# Altium PCB Arduino NG Ahuratus-PCB.PcbDoc (part 2 of 6)
Units mm, origin at the board's own origin, x right, y up, seen from the top; angles counter-clockwise.
Board outline 69 x 53.5 mm, 2 copper layers (Top Layer, Bottom Layer); 37 components, 49 nets, 193 pads, 40 vias.
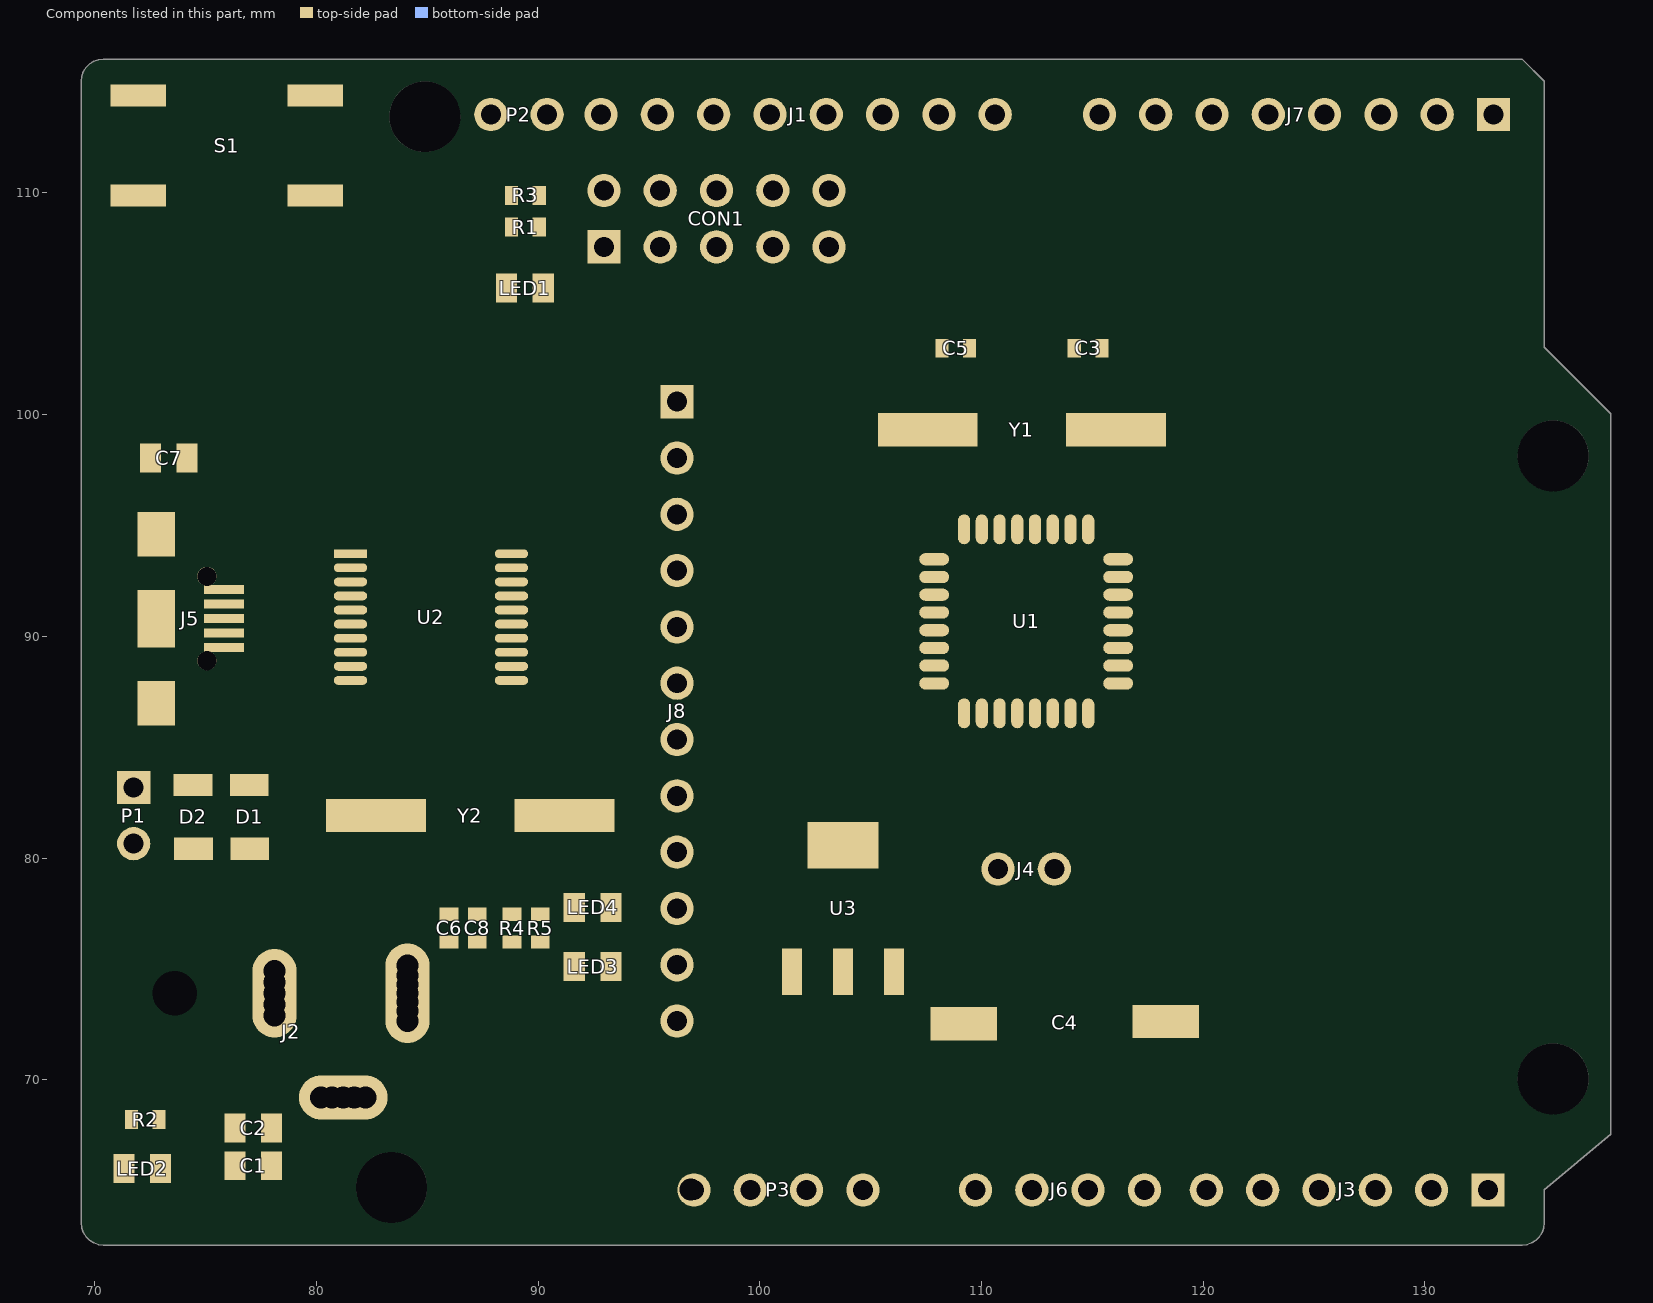
[diagram p2: the components of this part, seen from the top]

## Via types
v1: diameter 1.27, hole 0.711, Top Layer to Bottom Layer, 40 vias

## Nets (pads, with @x,y where several pads share a name; then routed paths per layer and width w, separated by ;. In a path a pad name is that pad's centre, name@x,y a point inside that pad or via, vN(x,y) a via of type N, cw(c..) or ccw(c..) an arc to the next point about the centre after c; other vN are vias at no path point) (continued)
copper on no net: | length 3553.7
  Top Layer w0.025: 115.367,107.518 115.951,107.518 ; 115.367,107.544 115.951,107.544 ; 115.367,107.569 115.926,107.569 ; 115.367,107.594 115.926,107.594 ; 115.367,107.62 115.926,107.62 ; 115.367,107.645 115.926,107.645 ; 115.367,107.671 115.926,107.671 ; 115.367,107.696 115.951,107.696 ; 115.367,107.721 115.951,107.721 ; 115.392,107.34 115.976,107.34 ; 115.392,107.366 115.976,107.366 ; 115.392,107.391 115.951,107.391 ; 115.392,107.417 115.951,107.417 ; 115.392,107.442 115.951,107.442 ; 115.392,107.467 115.951,107.467 ; 115.392,107.493 115.951,107.493 ; 115.392,107.747 115.951,107.747 ; 115.392,107.772 115.951,107.772 ; 115.392,107.798 115.951,107.798 ; 115.392,107.823 115.951,107.823 ; 115.392,107.848 115.951,107.848 ; 115.392,107.874 115.976,107.874 ; 115.392,107.899 115.976,107.899 ; 115.418,107.239 116.027,107.239 ; 115.418,107.264 116.002,107.264 ; 115.418,107.29 116.002,107.29 ; 115.418,107.315 115.976,107.315 ; 115.418,107.925 115.976,107.925 ; 115.418,107.95 116.002,107.95 ; 115.418,107.975 116.002,107.975 ; 115.418,108.001 116.027,108.001 ; 115.443,107.163 116.053,107.163 ; 115.443,107.188 116.053,107.188 ; 115.443,107.213 116.027,107.213 ; 115.443,108.026 116.027,108.026 ; 115.443,108.052 116.027,108.052 ; 115.443,108.077 116.053,108.077 ; 115.468,104.8 115.672,104.8 ; 115.468,104.826 115.697,104.826 ; 115.468,104.851 115.697,104.851 ; 115.468,107.086 116.103,107.086 ; 115.468,107.112 116.078,107.112 ; 115.468,107.137 116.078,107.137 ; 115.468,108.102 116.078,108.102 ; 115.468,108.128 116.078,108.128 ; 115.468,108.153 116.103,108.153 ; 115.494,104.877 115.697,104.877 ; 115.494,104.902 115.722,104.902 ; 115.494,104.927 115.722,104.927 ; 115.494,104.953 115.722,104.953 ; 115.494,107.036 116.129,107.036 ; 115.494,107.061 116.129,107.061 ; 115.494,108.179 116.129,108.179 ; 115.494,108.204 116.129,108.204 ; 115.494,108.229 116.154,108.229 ; 115.519,104.978 115.748,104.978 ; 115.519,105.004 116.332,105.004 ; 115.519,105.029 116.332,105.029 ; 115.519,106.985 116.18,106.985 ; 115.519,107.01 116.154,107.01 ; 115.519,108.255 116.18,108.255 ; 115.519,108.28 116.205,108.28 ; 115.545,105.054 116.307,105.054 ; 115.545,105.08 116.307,105.08 ; 115.545,105.105 116.307,105.105 ; 115.545,106.934 116.23,106.934 ; 115.545,106.959 116.205,106.959 ; 115.545,108.306 116.23,108.306 ; 115.57,105.131 116.281,105.131 ; 115.57,105.156 116.281,105.156 ; 115.57,105.181 115.799,105.181 ; 115.57,106.883 116.281,106.883 ; 115.57,106.909 116.256,106.909 ; 115.57,108.331 116.256,108.331 ; 115.57,108.356 116.281,108.356 ; 115.595,105.207 115.799,105.207 ; 115.595,105.232 115.824,105.232 ; 115.595,105.258 115.824,105.258 ; 115.595,105.283 115.824,105.283 ; 115.595,106.832 116.357,106.832 ; 115.595,106.858 116.332,106.858 ; 115.595,108.382 116.307,108.382 ; 115.595,108.407 116.357,108.407 ; 115.621,105.308 115.824,105.308 ; 115.621,105.334 115.849,105.334 ; 115.621,105.359 115.849,105.359 ; 115.621,106.807 116.408,106.807 ; 115.621,108.433 116.383,108.433 ; 115.646,105.385 115.849,105.385 ; 115.646,105.41 115.875,105.41 ; 115.646,105.435 115.875,105.435 ; 115.646,106.756 116.484,106.756 ; 115.646,106.782 116.434,106.782 ; 115.646,108.458 116.434,108.458 ; 115.646,108.483 116.484,108.483 ; 115.672,105.461 115.875,105.461 ; 115.672,105.486 115.875,105.486 ; 115.672,105.512 115.9,105.512 ; 115.672,106.731 116.535,106.731 ; 115.672,108.509 116.535,108.509 ; 115.697,105.537 115.9,105.537 ; 115.697,105.562 115.9,105.562 ; 115.697,105.588 116.154,105.588 ; 115.697,105.613 116.129,105.613 ; 115.697,106.705 116.611,106.705 ; 115.697,108.534 116.611,108.534 ; 115.722,105.639 116.129,105.639 ; 115.722,105.664 116.129,105.664 ; 115.722,105.689 116.129,105.689 ; 115.722,106.655 116.865,106.655 ; 115.722,106.68 116.713,106.68 ; 115.722,108.56 116.688,108.56 ; 115.722,108.585 116.865,108.585 ; 115.748,105.715 116.103,105.715 ; 115.748,105.74 116.103,105.74 ; 115.748,105.766 116.103,105.766 ; 115.748,106.629 118.237,106.629 ; 115.748,108.61 118.237,108.61 ; 115.773,105.791 116.078,105.791 ; 115.773,105.816 116.078,105.816 ; 115.773,106.604 118.212,106.604 ; 115.773,108.636 118.212,108.636 ; 115.799,106.578 118.186,106.578 ; 115.799,108.661 118.186,108.661 ; 115.824,106.553 118.161,106.553 ; 115.824,108.687 118.161,108.687 ; 115.849,106.528 118.135,106.528 ; 115.849,108.712 118.135,108.712 ; 115.875,106.502 118.11,106.502 ; 115.875,108.737 118.11,108.737 ; 115.9,106.477 118.085,106.477 ; 115.9,108.763 118.059,108.763 ; 115.926,105.537 116.154,105.537 ; 115.926,105.562 116.154,105.562 ; 115.926,108.788 118.034,108.788 ; 115.951,105.435 116.205,105.435 ; 115.951,105.461 116.18,105.461 ; 115.951,105.486 116.18,105.486 ; 115.951,105.512 116.18,105.512 ; 115.951,106.451 118.034,106.451 ; 115.976,105.359 116.23,105.359 ; 115.976,105.385 116.205,105.385 ; 115.976,105.41 116.205,105.41 ; 115.976,106.426 118.008,106.426 ; 115.976,108.814 118.008,108.814 ; 116.002,105.258 116.256,105.258 ; 116.002,105.283 116.23,105.283 ; 116.002,105.308 116.23,105.308 ; 116.002,105.334 116.23,105.334 ; 116.002,106.401 117.983,106.401 ; 116.002,108.839 117.958,108.839 ; 116.027,105.181 116.281,105.181 ; 116.027,105.207 116.256,105.207 ; 116.027,105.232 116.256,105.232 ; 116.053,106.375 117.932,106.375 ; 116.053,108.864 117.932,108.864 ; 116.078,106.35 117.907,106.35 ; 116.078,108.89 117.881,108.89 ; 116.103,104.902 116.357,104.902 ; 116.103,104.927 116.357,104.927 ; 116.103,104.953 116.332,104.953 ; 116.103,104.978 116.332,104.978 ; 116.103,108.915 117.856,108.915 ; 116.129,104.826 116.383,104.826 ; 116.129,104.851 116.383,104.851 ; 116.129,104.877 116.357,104.877 ; 116.129,106.324 117.856,106.324 ; 116.154,104.8 116.383,104.8 ; 116.154,108.941 117.805,108.941 ; 116.18,106.299 117.831,106.299 ; 116.205,106.274 117.78,106.274 ; 116.205,108.966 117.754,108.966 ; 116.256,106.248 117.729,106.248 ; 116.256,108.991 117.704,108.991 ; 116.307,109.017 117.653,109.017 ; 116.332,106.223 117.678,106.223 ; 116.383,106.197 117.602,106.197 ; 116.383,109.042 117.577,109.042 ; 116.459,104.826 116.688,104.826 ; 116.459,104.851 116.688,104.851 ; 116.459,104.877 116.688,104.877 ; 116.459,104.902 116.688,104.902 ; 116.459,104.927 116.688,104.927 ; 116.459,104.953 116.688,104.953 ; 116.459,104.978 116.688,104.978 ; 116.459,105.004 116.688,105.004 ; 116.459,105.029 116.688,105.029 ; 116.459,105.054 116.688,105.054 ; 116.459,105.08 116.688,105.08 ; 116.459,105.105 116.688,105.105 ; 116.459,105.131 116.688,105.131 ; 116.459,105.156 116.688,105.156 ; 116.459,105.181 116.688,105.181 ; 116.459,105.207 116.688,105.207 ; 116.459,105.232 117.043,105.232 ; 116.459,105.258 117.018,105.258 ; 116.459,105.283 116.992,105.283 ; 116.459,105.308 117.069,105.308 ; 116.459,105.334 117.094,105.334 ; 116.459,105.359 117.119,105.359 ; 116.459,105.385 116.688,105.385 ; 116.459,105.41 116.688,105.41 ; 116.459,105.435 116.688,105.435 ; 116.459,105.461 116.688,105.461 ; 116.459,105.486 116.688,105.486 ; 116.459,105.512 116.688,105.512 ; 116.459,105.537 116.688,105.537 ; 116.459,105.562 116.688,105.562 ; 116.459,105.588 116.688,105.588 ; 116.459,105.613 116.688,105.613 ; 116.459,105.639 116.688,105.639 ; 116.459,105.664 117.17,105.664 ; 116.459,105.689 117.145,105.689 ; 116.459,105.715 117.145,105.715 ; 116.459,105.74 117.119,105.74 ; 116.459,105.766 117.069,105.766 ; 116.459,105.791 117.043,105.791 ; 116.459,105.816 116.967,105.816 ; 116.459,106.172 117.551,106.172 ; 116.459,109.068 117.5,109.068 ; 116.484,104.8 116.688,104.8 ; 116.51,107.518 117.5,107.518 ; 116.51,107.544 117.5,107.544 ; 116.51,107.569 117.5,107.569 ; 116.51,107.594 117.5,107.594 ; 116.51,107.62 117.5,107.62 ; 116.51,107.645 117.5,107.645 ; 116.51,107.671 117.5,107.671 ; 116.51,107.696 117.5,107.696 ; 116.51,107.721 117.5,107.721 ; 116.51,107.747 117.5,107.747 ; 116.51,107.772 117.5,107.772 ; 116.51,107.798 117.5,107.798 ; 116.51,107.823 117.475,107.823 ; 116.535,106.147 117.45,106.147 ; 116.535,109.093 117.424,109.093 ; 116.637,109.118 117.297,109.118 ; 116.662,106.121 117.348,106.121 ; 116.713,105.207 117.069,105.207 ; 116.815,105.181 117.069,105.181 ; 116.815,105.385 117.145,105.385 ; 116.815,109.144 117.119,109.144 ; 116.84,105.156 117.094,105.156 ; 116.865,105.08 117.119,105.08 ; 116.865,105.105 117.119,105.105 ; 116.865,105.131 117.094,105.131 ; 116.865,105.639 117.17,105.639 ; 116.865,106.096 117.17,106.096 ; 116.891,105.029 117.145,105.029 ; 116.891,105.054 117.145,105.054 ; 116.891,105.41 117.17,105.41 ; 116.916,104.978 117.17,104.978 ; 116.916,105.004 117.17,105.004 ; 116.916,105.435 117.17,105.435 ; 116.916,105.613 117.196,105.613 ; 116.942,104.927 117.196,104.927 ; 116.942,104.953 117.196,104.953 ; 116.942,105.461 117.17,105.461 ; 116.942,105.486 117.196,105.486 ; 116.942,105.512 117.196,105.512 ; 116.942,105.537 117.196,105.537 ; 116.942,105.562 117.196,105.562 ; 116.942,105.588 117.196,105.588 ; 116.967,104.877 117.221,104.877 ; 116.967,104.902 117.221,104.902 ; 116.992,104.8 117.272,104.8 ; 116.992,104.826 117.246,104.826 ; 116.992,104.851 117.246,104.851 ; 117.069,108.585 118.262,108.585 ; 117.17,106.655 118.262,106.655 ; 117.246,108.56 118.288,108.56 ; 117.297,106.68 118.288,106.68 ; 117.348,104.8 117.78,104.8 ; 117.348,104.826 117.881,104.826 ; 117.348,104.851 117.932,104.851 ; 117.348,104.877 117.983,104.877 ; 117.348,104.902 118.008,104.902 ; 117.348,104.927 118.034,104.927 ; 117.348,104.953 118.059,104.953 ; 117.348,104.978 117.577,104.978 ; 117.348,105.004 117.577,105.004 ; 117.348,105.029 117.577,105.029 ; 117.348,105.054 117.577,105.054 ; 117.348,105.08 117.577,105.08 ; 117.348,105.105 117.577,105.105 ; 117.348,105.131 117.577,105.131 ; 117.348,105.156 117.577,105.156 ; 117.348,105.181 117.577,105.181 ; 117.348,105.207 117.577,105.207 ; 117.348,105.232 117.577,105.232 ; 117.348,105.258 117.577,105.258 ; 117.348,105.283 117.577,105.283 ; 117.348,105.308 117.577,105.308 ; 117.348,105.334 117.577,105.334 ; 117.348,105.359 117.577,105.359 ; 117.348,105.385 117.577,105.385 ; 117.348,105.41 117.577,105.41 ; 117.348,105.435 117.577,105.435 ; 117.348,105.461 117.577,105.461 ; 117.348,105.486 117.577,105.486 ; 117.348,105.512 117.577,105.512 ; 117.348,105.537 117.577,105.537 ; 117.348,105.562 117.577,105.562 ; 117.348,105.588 117.577,105.588 ; 117.348,105.613 117.577,105.613 ; 117.348,105.639 117.577,105.639 ; 117.348,105.664 118.085,105.664 ; 117.348,105.689 118.059,105.689 ; 117.348,105.715 118.034,105.715 ; 117.348,105.74 118.008,105.74 ; 117.348,105.766 117.958,105.766 ; 117.348,105.791 117.932,105.791 ; 117.348,105.816 117.831,105.816 ; 117.348,108.534 118.313,108.534 ; 117.399,106.705 118.313,106.705 ; 117.424,108.509 118.339,108.509 ; 117.45,106.731 118.313,106.731 ; 117.475,108.483 118.364,108.483 ; 117.5,106.756 118.339,106.756 ; 117.526,108.458 118.389,108.458 ; 117.551,106.782 118.364,106.782 ; 117.577,108.433 118.389,108.433 ; 117.602,106.807 118.389,106.807 ; 117.602,108.407 118.415,108.407 ; 117.627,106.832 118.415,106.832 ; 117.653,106.858 118.415,106.858 ; 117.653,108.382 118.44,108.382 ; 117.678,108.356 118.466,108.356 ; 117.704,106.883 118.44,106.883 ; 117.704,108.331 118.491,108.331 ; 117.729,104.978 118.085,104.978 ; 117.729,106.909 118.466,106.909 ; 117.754,105.639 118.11,105.639 ; 117.754,106.934 118.491,106.934 ; 117.754,108.306 118.491,108.306 ; 117.78,106.959 118.491,106.959 ; 117.78,108.28 118.516,108.28 ; 117.805,105.004 118.085,105.004 ; 117.805,105.613 118.11,105.613 ; 117.805,106.985 118.516,106.985 ; 117.805,108.255 118.542,108.255 ; 117.831,105.029 118.11,105.029 ; 117.831,107.01 118.542,107.01 ; 117.831,108.229 118.567,108.229 ; 117.856,105.054 118.135,105.054 ; 117.856,105.588 118.135,105.588 ; 117.856,107.036 118.542,107.036 ; 117.856,108.204 118.567,108.204 ; 117.881,105.08 118.135,105.08 ; 117.881,105.537 118.135,105.537 ; 117.881,105.562 118.135,105.562 ; 117.881,107.061 118.567,107.061 ; 117.881,107.086 118.593,107.086 ; 117.881,108.179 118.593,108.179 ; 117.907,105.105 118.135,105.105 ; 117.907,105.131 118.161,105.131 ; 117.907,105.156 118.161,105.156 ; 117.907,105.461 118.161,105.461 ; 117.907,105.486 118.161,105.486 ; 117.907,105.512 118.161,105.512 ; 117.907,107.112 118.593,107.112 ; 117.907,108.153 119.304,108.153 ; 117.932,105.181 118.161,105.181 ; 117.932,105.207 118.161,105.207 ; 117.932,105.232 118.161,105.232 ; 117.932,105.258 118.161,105.258 ; 117.932,105.283 118.161,105.283 ; 117.932,105.308 118.161,105.308 ; 117.932,105.334 118.161,105.334 ; 117.932,105.359 118.161,105.359 ; 117.932,105.385 118.161,105.385 ; 117.932,105.41 118.161,105.41 ; 117.932,105.435 118.161,105.435 ; 117.932,107.137 119.278,107.137 ; 117.932,108.128 119.278,108.128 ; 117.958,107.163 119.253,107.163 ; 117.958,108.102 119.253,108.102 ; 117.983,107.188 119.228,107.188 ; 117.983,107.213 119.228,107.213 ; 117.983,108.052 119.228,108.052 ; 117.983,108.077 119.228,108.077 ; 118.008,107.239 119.202,107.239 ; 118.008,108.026 119.202,108.026 ; 118.034,107.264 119.177,107.264 ; 118.034,108.001 119.177,108.001 ; 118.059,107.29 119.151,107.29 ; 118.059,107.315 119.151,107.315 ; 118.059,107.95 119.151,107.95 ; 118.059,107.975 119.151,107.975 ; 118.085,107.34 119.126,107.34 ; 118.085,107.925 119.126,107.925 ; 118.11,107.366 119.101,107.366 ; 118.11,107.391 119.101,107.391 ; 118.11,107.874 119.075,107.874 ; 118.11,107.899 119.101,107.899 ; 118.135,107.417 119.075,107.417 ; 118.135,107.848 119.075,107.848 ; 118.161,107.442 119.05,107.442 ; 118.161,107.467 119.05,107.467 ; 118.161,107.823 119.05,107.823 ; 118.186,107.493 119.024,107.493 ; 118.186,107.518 119.024,107.518 ; 118.186,107.772 119.024,107.772 ; 118.186,107.798 119.024,107.798 ; 118.212,107.544 118.999,107.544 ; 118.212,107.721 118.974,107.721 ; 118.212,107.747 118.999,107.747 ; 118.237,107.569 118.974,107.569 ; 118.237,107.594 118.974,107.594 ; 118.237,107.696 118.974,107.696 ; 118.262,105.029 118.516,105.029 ; 118.262,105.054 118.491,105.054 ; 118.262,105.08 118.491,105.08 ; 118.262,105.105 118.491,105.105 ; 118.262,105.131 118.491,105.131 ; 118.262,105.156 118.491,105.156 ; 118.262,105.181 118.491,105.181 ; 118.262,105.207 118.491,105.207 ; 118.262,105.232 118.491,105.232 ; 118.262,105.258 118.491,105.258 ; 118.262,105.283 118.491,105.283 ; 118.262,105.308 118.491,105.308 ; 118.262,105.334 118.491,105.334 ; 118.262,105.359 118.491,105.359 ; 118.262,105.385 118.491,105.385 ; 118.262,105.41 118.491,105.41 ; 118.262,105.435 118.491,105.435 ; 118.262,105.461 118.491,105.461 ; 118.262,105.486 118.491,105.486 ; 118.262,105.512 118.491,105.512 ; 118.262,105.537 118.491,105.537 ; 118.262,105.562 118.491,105.562 ; 118.262,105.588 118.491,105.588 ; 118.262,105.613 118.491,105.613 ; 118.262,105.639 118.491,105.639 ; 118.262,105.664 118.491,105.664 ; 118.262,105.689 118.491,105.689 ; 118.262,105.715 118.491,105.715 ; 118.262,105.74 118.491,105.74 ; 118.262,105.766 118.491,105.766 ; 118.262,105.791 118.491,105.791 ; 118.262,105.816 118.491,105.816 ; 118.262,107.62 118.948,107.62 ; 118.262,107.645 118.948,107.645 ; 118.262,107.671 118.948,107.671 ; 118.288,104.953 118.999,104.953 ; 118.288,104.978 118.542,104.978 ; 118.288,105.004 118.516,105.004 ; 118.313,104.902 118.974,104.902 ; 118.313,104.927 118.999,104.927 ; 118.339,104.877 118.948,104.877 ; 118.364,104.851 118.923,104.851 ; 118.415,104.826 118.897,104.826 ; 118.466,104.8 118.847,104.8 ; 118.567,104.775 118.745,104.775 ; 118.618,107.086 119.329,107.086 ; 118.618,107.112 119.304,107.112 ; 118.618,108.179 119.329,108.179 ; 118.643,107.061 119.329,107.061 ; 118.643,108.204 119.355,108.204 ; 118.643,108.229 119.38,108.229 ; 118.669,107.01 119.38,107.01 ; 118.669,107.036 119.355,107.036 ; 118.669,108.255 119.405,108.255 ; 118.694,106.985 119.405,106.985 ; 118.694,108.28 119.431,108.28 ; 118.72,106.934 119.456,106.934 ; 118.72,106.959 119.431,106.959 ; 118.72,108.306 119.456,108.306 ; 118.72,108.331 119.482,108.331 ; 118.745,106.909 119.482,106.909 ; 118.745,108.356 119.532,108.356 ; 118.77,104.978 119.024,104.978 ; 118.77,106.883 119.507,106.883 ; 118.77,108.382 119.558,108.382 ; 118.796,105.004 119.024,105.004 ; 118.796,106.832 119.583,106.832 ; 118.796,106.858 119.558,106.858 ; 118.796,108.407 119.609,108.407 ; 118.821,105.029 119.05,105.029 ; 118.821,105.054 119.05,105.054 ; 118.821,105.08 119.05,105.08 ; 118.821,105.105 119.05,105.105 ; 118.821,105.131 119.05,105.131 ; 118.821,105.156 119.05,105.156 ; 118.821,105.181 119.05,105.181 ; 118.821,105.207 119.05,105.207 ; 118.821,105.232 119.05,105.232 ; 118.821,105.258 119.05,105.258 ; 118.821,105.283 119.05,105.283 ; 118.821,105.308 119.05,105.308 ; 118.821,105.334 119.05,105.334 ; 118.821,105.359 119.05,105.359 ; 118.821,105.385 119.05,105.385 ; 118.821,105.41 119.05,105.41 ; 118.821,105.435 119.05,105.435 ; 118.821,105.461 119.05,105.461 ; 118.821,105.486 119.05,105.486 ; 118.821,105.512 119.05,105.512 ; 118.821,105.537 119.05,105.537 ; 118.821,105.562 119.05,105.562 ; 118.821,105.588 119.05,105.588 ; 118.821,105.613 119.05,105.613 ; 118.821,105.639 119.05,105.639 ; 118.821,105.664 119.05,105.664 ; 118.821,105.689 119.05,105.689 ; 118.821,105.715 119.05,105.715 ; 118.821,105.74 119.05,105.74 ; 118.821,105.766 119.05,105.766 ; 118.821,105.791 119.05,105.791 ; 118.821,105.816 119.05,105.816 ; 118.821,106.807 119.609,106.807 ; 118.821,108.433 119.634,108.433 ; 118.821,108.458 119.685,108.458 ; 118.847,106.782 119.659,106.782 ; 118.847,108.483 119.736,108.483 ; 118.872,106.756 119.71,106.756 ; 118.872,108.509 119.786,108.509 ; 118.897,106.705 119.812,106.705 ; 118.897,106.731 119.761,106.731 ; 118.897,108.534 119.863,108.534 ; 118.923,106.68 119.913,106.68 ; 118.923,108.56 119.964,108.56 ; 118.948,106.655 120.04,106.655 ; 118.948,108.585 120.142,108.585 ; 118.974,106.629 121.463,106.629 ; 118.974,108.61 121.463,108.61 ; 118.999,106.604 121.437,106.604 ; 118.999,108.636 121.437,108.636 ; 119.024,106.578 121.412,106.578 ; 119.024,108.661 121.412,108.661 ; 119.05,106.553 121.387,106.553 ; 119.05,108.687 121.387,108.687 ; 119.075,106.528 121.361,106.528 ; 119.075,108.712 121.361,108.712 ; 119.101,106.502 121.336,106.502 ; 119.101,108.737 121.336,108.737 ; 119.126,106.477 121.31,106.477 ; 119.151,108.763 121.31,108.763 ; 119.177,106.451 121.26,106.451 ; 119.177,108.788 121.26,108.788 ; 119.202,106.426 121.234,106.426 ; 119.202,108.814 121.234,108.814 ; 119.228,104.8 119.913,104.8 ; 119.228,104.826 119.913,104.826 ; 119.228,104.851 119.913,104.851 ; 119.228,104.877 119.913,104.877 ; 119.228,104.902 119.913,104.902 ; 119.228,104.927 119.913,104.927 ; 119.228,104.953 119.913,104.953 ; 119.228,105.664 119.913,105.664 ; 119.228,105.689 119.913,105.689 ; 119.228,105.715 119.913,105.715 ; 119.228,105.74 119.913,105.74 ; 119.228,105.766 119.913,105.766 ; 119.228,105.791 119.913,105.791 ; 119.228,105.816 119.913,105.816 ; 119.228,106.401 121.209,106.401 ; 119.253,108.839 121.209,108.839 ; 119.278,106.375 121.158,106.375 ; 119.278,108.864 121.158,108.864 ; 119.304,106.35 121.133,106.35 ; 119.329,108.89 121.133,108.89 ; 119.355,106.324 121.082,106.324 ; 119.355,108.915 121.082,108.915 ; 119.38,106.299 121.031,106.299 ; 119.405,108.941 121.056,108.941 ; 119.431,106.274 121.006,106.274 ; 119.456,104.978 119.685,104.978 ; 119.456,105.004 119.685,105.004 ; 119.456,105.029 119.685,105.029 ; 119.456,105.054 119.685,105.054 ; 119.456,105.08 119.685,105.08 ; 119.456,105.105 119.685,105.105 ; 119.456,105.131 119.685,105.131 ; 119.456,105.156 119.685,105.156 ; 119.456,105.181 119.685,105.181 ; 119.456,105.207 119.685,105.207 ; 119.456,105.232 119.685,105.232 ; 119.456,105.258 119.685,105.258 ; 119.456,105.283 119.685,105.283 ; 119.456,105.308 119.685,105.308 ; 119.456,105.334 119.685,105.334 ; 119.456,105.359 119.685,105.359 ; 119.456,105.385 119.685,105.385 ; 119.456,105.41 119.685,105.41 ; 119.456,105.435 119.685,105.435 ; 119.456,105.461 119.685,105.461 ; 119.456,105.486 119.685,105.486 ; 119.456,105.512 119.685,105.512 ; 119.456,105.537 119.685,105.537 ; 119.456,105.562 119.685,105.562 ; 119.456,105.588 119.685,105.588 ; 119.456,105.613 119.685,105.613 ; 119.456,105.639 119.685,105.639 ; 119.456,108.966 121.006,108.966 ; 119.482,106.248 120.955,106.248 ; 119.507,108.991 120.955,108.991 ; 119.532,106.223 120.879,106.223 ; 119.558,109.017 120.904,109.017 ; 119.609,106.197 120.828,106.197 ; 119.634,109.042 120.828,109.042 ; 119.659,106.172 120.752,106.172 ; 119.71,107.493 120.65,107.493 ; 119.71,107.518 120.65,107.518 ; 119.71,107.544 120.65,107.544 ; 119.71,107.569 120.65,107.569 ; 119.71,107.594 120.65,107.594 ; 119.71,107.62 120.65,107.62 ; 119.71,107.645 120.65,107.645 ; 119.71,107.671 120.65,107.671 ; 119.71,107.696 120.65,107.696 ; 119.71,107.721 120.65,107.721 ; 119.71,107.747 120.65,107.747 ; 119.71,107.772 120.65,107.772 ; 119.71,107.798 120.65,107.798 ; 119.71,107.823 120.65,107.823 ; 119.71,109.068 120.752,109.068 ; 119.761,106.147 120.675,106.147 ; 119.786,109.093 120.675,109.093 ; 119.863,106.121 120.548,106.121 ; 119.913,109.118 120.574,109.118 ; 119.99,107.213 120.345,107.213 ; 119.99,107.239 120.345,107.239 ; 119.99,107.264 120.345,107.264 ; 119.99,107.29 120.345,107.29 ; 119.99,107.315 120.345,107.315 ; 119.99,107.34 120.345,107.34 ; 119.99,107.366 120.345,107.366 ; 119.99,107.391 120.345,107.391 ; 119.99,107.417 120.345,107.417 ; 119.99,107.442 120.345,107.442 ; 119.99,107.467 120.345,107.467 ; 119.99,107.848 120.345,107.848 ; 119.99,107.874 120.345,107.874 ; 119.99,107.899 120.345,107.899 ; 119.99,107.925 120.345,107.925 ; 119.99,107.95 120.345,107.95 ; 119.99,107.975 120.345,107.975 ; 119.99,108.001 120.345,108.001 ; 119.99,108.026 120.345,108.026 ; 119.99,108.052 120.345,108.052 ; 119.99,108.077 120.345,108.077 ; 119.99,108.102 120.345,108.102 ; 119.99,108.128 120.345,108.128 ; 120.04,106.096 120.345,106.096 ; 120.091,104.8 120.294,104.8 ; 120.091,104.826 120.294,104.826 ; 120.091,104.851 120.294,104.851 ; 120.091,104.877 120.294,104.877 ; 120.091,104.902 120.294,104.902 ; 120.091,104.927 120.294,104.927 ; 120.091,104.953 120.294,104.953 ; 120.091,104.978 120.294,104.978 ; 120.091,105.004 120.294,105.004 ; 120.091,105.029 120.294,105.029 ; 120.091,105.054 120.294,105.054 ; 120.091,105.08 120.294,105.08 ; 120.091,105.105 120.294,105.105 ; 120.091,105.131 120.294,105.131 ; 120.091,105.156 120.294,105.156 ; 120.091,105.181 120.294,105.181 ; 120.091,105.207 120.294,105.207 ; 120.091,105.232 120.294,105.232 ; 120.091,105.258 120.294,105.258 ; 120.091,105.283 120.294,105.283 ; 120.091,105.308 120.294,105.308 ; 120.091,105.334 120.294,105.334 ; 120.091,105.359 120.294,105.359 ; 120.091,105.385 120.294,105.385 ; 120.091,105.41 120.294,105.41 ; 120.091,105.435 120.294,105.435 ; 120.091,105.461 120.523,105.461 ; 120.091,105.486 120.523,105.486 ; 120.091,105.512 120.498,105.512 ; 120.091,105.537 120.498,105.537 ; 120.091,105.562 120.472,105.562 ; 120.091,105.588 120.472,105.588 ; 120.091,105.613 120.447,105.613 ; 120.091,105.639 120.447,105.639 ; 120.091,105.664 120.421,105.664 ; 120.091,105.689 120.421,105.689 ; 120.091,105.715 120.421,105.715 ; 120.091,105.74 120.396,105.74 ; 120.091,105.766 120.396,105.766 ; 120.091,105.791 120.371,105.791 ; 120.091,105.816 120.371,105.816 ; 120.091,109.144 120.396,109.144 ; 120.32,105.41 120.548,105.41 ; 120.32,105.435 120.548,105.435 ; 120.345,105.359 120.574,105.359 ; 120.345,105.385 120.574,105.385 ; 120.345,106.655 121.488,106.655 ; 120.345,108.585 121.488,108.585 ; 120.371,105.308 120.599,105.308 ; 120.371,105.334 120.599,105.334 ; 120.396,105.258 120.625,105.258 ; 120.396,105.283 120.599,105.283 ; 120.421,105.181 120.65,105.181 ; 120.421,105.207 120.65,105.207 ; 120.421,105.232 120.625,105.232 ; 120.447,105.131 120.879,105.131 ; 120.447,105.156 120.879,105.156 ; 120.472,105.08 120.879,105.08 ; 120.472,105.105 120.879,105.105 ; 120.498,105.029 120.879,105.029 ; 120.498,105.054 120.879,105.054 ; 120.498,106.68 121.488,106.68 ; 120.523,104.978 120.879,104.978 ; 120.523,105.004 120.879,105.004 ; 120.523,108.56 121.488,108.56 ; 120.548,104.927 120.879,104.927 ; 120.548,104.953 120.879,104.953 ; 120.574,104.877 120.879,104.877 ; 120.574,104.902 120.879,104.902 ; 120.599,104.8 120.879,104.8 ; 120.599,104.826 120.879,104.826 ; 120.599,104.851 120.879,104.851 ; 120.599,106.705 121.514,106.705 ; 120.599,108.534 121.514,108.534 ; 120.675,105.181 120.879,105.181 ; 120.675,105.207 120.879,105.207 ; 120.675,105.232 120.879,105.232 ; 120.675,105.258 120.879,105.258 ; 120.675,105.283 120.879,105.283 ; 120.675,105.308 120.879,105.308 ; 120.675,105.334 120.879,105.334 ; 120.675,105.359 120.879,105.359 ; 120.675,105.385 120.879,105.385 ; 120.675,105.41 120.879,105.41 ; 120.675,105.435 120.879,105.435 ; 120.675,105.461 120.879,105.461 ; 120.675,105.486 120.879,105.486 ; 120.675,105.512 120.879,105.512 ; 120.675,105.537 120.879,105.537 ; 120.675,105.562 120.879,105.562 ; 120.675,105.588 120.879,105.588 ; 120.675,105.613 120.879,105.613 ; 120.675,105.639 120.879,105.639 ; 120.675,105.664 120.879,105.664 ; 120.675,105.689 120.879,105.689 ; 120.675,105.715 120.879,105.715 ; 120.675,105.74 120.879,105.74 ; 120.675,105.766 120.879,105.766 ; 120.675,105.791 120.879,105.791 ; 120.675,105.816 120.879,105.816 ; 120.675,106.731 121.539,106.731 ; 120.675,108.509 121.539,108.509 ; 120.726,106.756 121.564,106.756 ; 120.726,108.483 121.564,108.483 ; 120.777,106.782 121.564,106.782 ; 120.777,108.458 121.564,108.458 ; 120.802,106.807 121.59,106.807 ; 120.828,108.433 121.59,108.433 ; 120.853,106.832 121.615,106.832 ; 120.853,108.407 121.615,108.407 ; 120.879,106.858 121.615,106.858 ; 120.904,108.382 121.615,108.382 ; 120.929,106.883 121.641,106.883 ; 120.929,108.356 121.641,108.356 ; 120.955,105.156 121.209,105.156 ; 120.955,105.181 121.209,105.181 ; 120.955,105.207 121.183,105.207 ; 120.955,105.232 121.183,105.232 ; 120.955,105.258 121.183,105.258 ; 120.955,105.283 121.183,105.283 ; 120.955,105.308 121.183,105.308 ; 120.955,105.334 121.183,105.334 ; 120.955,105.359 121.183,105.359 ; 120.955,105.385 121.183,105.385 ; 120.955,105.41 121.183,105.41 ; 120.955,105.435 121.209,105.435 ; 120.955,106.909 121.641,106.909 ; 120.955,108.331 121.641,108.331 ; 120.98,105.054 121.234,105.054 ; 120.98,105.08 121.234,105.08 ; 120.98,105.105 121.209,105.105 ; 120.98,105.131 121.209,105.131 ; 120.98,105.461 121.209,105.461 ; 120.98,105.486 121.209,105.486 ; 120.98,105.512 121.209,105.512 ; 120.98,105.537 121.234,105.537 ; 120.98,106.934 121.666,106.934 ; 120.98,108.306 121.666,108.306 ; 121.006,105.004 121.285,105.004 ; 121.006,105.029 121.26,105.029 ; 121.006,105.562 121.234,105.562 ; 121.006,105.588 121.26,105.588 ; 121.006,105.613 121.285,105.613 ; 121.006,106.959 121.666,106.959 ; 121.006,108.28 121.691,108.28 ; 121.031,104.953 121.742,104.953 ; 121.031,104.978 121.31,104.978 ; 121.031,105.639 121.31,105.639 ; 121.031,106.985 121.691,106.985 ; 121.031,108.255 121.691,108.255 ; 121.056,104.902 121.691,104.902 ; 121.056,104.927 121.717,104.927 ; 121.056,105.664 121.742,105.664 ; 121.056,105.689 121.742,105.689 ; 121.056,107.01 121.691,107.01 ; 121.056,108.229 121.717,108.229 ; 121.082,104.877 121.666,104.877 ; 121.082,105.715 121.717,105.715 ; 121.082,107.036 121.717,107.036 ; 121.082,107.061 121.717,107.061 ; 121.082,108.179 121.717,108.179 ; 121.082,108.204 121.717,108.204 ; 121.107,105.74 121.691,105.74 ; 121.107,107.086 121.742,107.086 ; 121.107,108.153 121.742,108.153 ; 121.133,104.851 121.641,104.851 ; 121.133,105.766 121.666,105.766 ; 121.133,107.112 121.742,107.112 ; 121.133,107.137 121.742,107.137 ; 121.133,108.102 121.742,108.102 ; 121.133,108.128 121.742,108.128 ; 121.158,104.826 121.615,104.826 ; 121.158,107.163 121.768,107.163 ; 121.158,107.188 121.768,107.188 ; 121.158,108.077 121.768,108.077 ; 121.183,105.791 121.641,105.791 ; 121.183,107.213 121.768,107.213 ; 121.183,107.239 121.793,107.239 ; 121.183,108.001 121.793,108.001 ; 121.183,108.026 121.768,108.026 ; 121.183,108.052 121.768,108.052 ; 121.209,104.8 121.564,104.8 ; 121.209,107.264 121.793,107.264 ; 121.209,107.29 121.793,107.29 ; 121.209,107.95 121.793,107.95 ; 121.209,107.975 121.793,107.975 ; 121.234,105.816 121.59,105.816 ; 121.234,107.315 121.793,107.315 ; 121.234,107.34 121.818,107.34 ; 121.234,107.366 121.818,107.366 ; 121.234,107.874 121.818,107.874 ; 121.234,107.899 121.818,107.899 ; 121.234,107.925 121.793,107.925 ; 121.26,107.391 121.818,107.391 ; 121.26,107.417 121.818,107.417 ; 121.26,107.442 121.818,107.442 ; 121.26,107.467 121.818,107.467 ; 121.26,107.493 121.818,107.493 ; 121.26,107.518 121.818,107.518 ; 121.26,107.544 121.844,107.544 ; 121.26,107.569 121.844,107.569 ; 121.26,107.696 121.844,107.696 ; 121.26,107.721 121.844,107.721 ; 121.26,107.747 121.818,107.747 ; 121.26,107.772 121.818,107.772 ; 121.26,107.798 121.818,107.798 ; 121.26,107.823 121.818,107.823 ; 121.26,107.848 121.818,107.848 ; 121.285,107.594 121.844,107.594 ; 121.285,107.62 121.844,107.62 ; 121.285,107.645 121.844,107.645 ; 121.285,107.671 121.844,107.671 ; 121.31,104.775 121.463,104.775 ; 121.31,105.842 121.488,105.842 ; 121.463,104.978 121.768,104.978 ; 121.463,105.639 121.768,105.639 ; 121.514,105.004 121.768,105.004 ; 121.514,105.613 121.768,105.613 ; 121.539,105.029 121.793,105.029 ; 121.539,105.054 121.793,105.054 ; 121.539,105.562 121.793,105.562 ; 121.539,105.588 121.793,105.588 ; 121.564,105.08 121.793,105.08 ; 121.564,105.105 121.818,105.105 ; 121.564,105.131 121.818,105.131 ; 121.564,105.486 121.818,105.486 ; 121.564,105.512 121.818,105.512 ; 121.564,105.537 121.818,105.537 ; 121.59,105.156 121.818,105.156 ; 121.59,105.181 121.818,105.181 ; 121.59,105.207 121.818,105.207 ; 121.59,105.232 121.818,105.232 ; 121.59,105.258 121.818,105.258 ; 121.59,105.283 121.818,105.283 ; 121.59,105.308 121.818,105.308 ; 121.59,105.334 121.818,105.334 ; 121.59,105.359 121.818,105.359 ; 121.59,105.385 121.818,105.385 ; 121.59,105.41 121.818,105.41 ; 121.59,105.435 121.818,105.435 ; 121.59,105.461 121.818,105.461
  Top Layer w0.076: 78.156,99.72 78.461,99.72 ; 78.156,100.254 78.308,100.254 ; 78.156,100.33 78.384,100.33 ; 78.156,100.406 78.384,100.406 ; 78.156,100.482 78.384,100.482 ; 78.156,100.559 78.384,100.559 ; 78.156,100.635 78.384,100.635 ; 78.232,99.568 79.223,99.568 ; 78.232,99.644 78.842,99.644 ; 78.232,100.711 78.461,100.711 ; 78.232,100.787 78.461,100.787 ; 78.232,100.863 78.461,100.863 ; 78.232,100.94 78.461,100.94 ; 78.232,101.016 78.461,101.016 ; 78.232,101.092 78.461,101.092 ; 78.308,101.168 78.461,101.168 ; 78.308,101.244 78.537,101.244 ; 78.308,101.321 78.537,101.321 ; 78.308,101.397 78.537,101.397 ; 78.308,101.473 78.537,101.473 ; 78.384,98.882 78.613,98.882 ; 78.384,98.958 78.689,98.958 ; 78.384,101.549 78.613,101.549 ; 78.384,101.625 78.613,101.625 ; 78.384,101.702 78.613,101.702 ; 78.384,101.778 78.689,101.778 ; 78.461,98.501 78.765,98.501 ; 78.461,98.577 79.146,98.577 ; 78.461,98.806 78.537,98.806 ; 78.461,99.035 78.765,99.035 ; 78.461,99.263 78.689,99.263 ; 78.461,99.339 78.689,99.339 ; 78.461,99.416 78.689,99.416 ; 78.461,99.492 79.299,99.492 ; 78.461,101.854 78.689,101.854 ; 78.461,101.93 78.689,101.93 ; 78.537,98.425 78.689,98.425 ; 78.537,99.111 78.918,99.111 ; 78.537,99.187 78.994,99.187 ; 78.537,102.006 78.765,102.006 ; 78.537,102.083 78.765,102.083 ; 78.537,102.159 78.765,102.159 ; 78.613,102.235 78.842,102.235 ; 78.613,102.311 78.842,102.311 ; 78.613,102.387 78.918,102.387 ; 78.689,98.654 79.07,98.654 ; 78.689,102.464 78.918,102.464 ; 78.765,98.73 79.223,98.73 ; 78.765,99.263 79.07,99.263 ; 78.765,102.54 78.994,102.54 ; 78.765,102.616 78.994,102.616 ; 78.842,97.892 78.994,97.892 ; 78.842,97.968 79.146,97.968 ; 78.842,98.044 79.299,98.044 ; 78.842,99.339 79.146,99.339 ; 78.842,102.692 79.07,102.692 ; 78.842,102.768 79.07,102.768 ; 78.918,98.501 79.146,98.501 ; 78.918,98.806 79.299,98.806 ; 78.918,99.416 79.223,99.416 ; 78.918,102.845 79.146,102.845 ; 78.918,102.921 79.223,102.921 ; 78.994,98.12 79.375,98.12 ; 78.994,98.349 79.223,98.349 ; 78.994,98.425 79.223,98.425 ; 78.994,102.997 79.223,102.997 ; 79.07,97.434 79.299,97.434 ; 79.07,97.511 79.299,97.511 ; 79.07,97.587 79.375,97.587 ; 79.07,98.196 79.604,98.196 ; 79.07,98.273 79.68,98.273 ; 79.07,98.882 79.375,98.882 ; 79.07,103.073 79.299,103.073 ; 79.07,103.149 79.375,103.149 ; 79.146,97.282 79.451,97.282 ; 79.146,97.358 79.375,97.358 ; 79.146,97.663 79.375,97.663 ; 79.146,103.226 79.375,103.226 ; 79.223,97.206 79.832,97.206 ; 79.223,97.739 79.527,97.739 ; 79.223,98.958 79.375,98.958 ; 79.223,103.302 79.451,103.302 ; 79.223,103.378 79.527,103.378 ; 79.299,97.13 79.756,97.13 ; 79.299,97.815 79.604,97.815 ; 79.299,103.454 79.604,103.454 ; 79.375,97.892 79.68,97.892 ; 79.375,103.53 79.68,103.53 ; 79.451,98.349 79.68,98.349 ; 79.451,103.607 79.756,103.607 ; 79.527,97.968 79.832,97.968 ; 79.527,103.683 79.832,103.683 ; 79.604,97.282 79.908,97.282 ; 79.604,98.044 79.832,98.044 ; 79.604,98.425 79.68,98.425 ; 79.604,103.759 79.985,103.759 ; 79.68,97.358 80.061,97.358 ; 79.68,98.12 79.832,98.12 ; 79.68,103.835 80.061,103.835 ; 79.756,96.672 79.908,96.672 ; 79.756,96.749 79.985,96.749 ; 79.756,97.434 80.137,97.434 ; 79.756,103.911 80.137,103.911 ; 79.832,96.825 80.289,96.825 ; 79.832,103.988 80.213,103.988 ; 79.908,96.901 80.213,96.901 ; 79.908,96.977 80.213,96.977 ; 79.908,97.511 80.213,97.511 ; 79.908,104.064 80.289,104.064 ; 79.985,97.053 80.289,97.053 ; 79.985,97.587 80.213,97.587 ; 79.985,104.14 80.366,104.14 ; 80.061,97.13 80.366,97.13 ; 80.137,96.291 80.366,96.291 ; 80.137,96.368 80.366,96.368 ; 80.137,96.444 80.366,96.444 ; 80.137,96.52 80.366,96.52 ; 80.137,96.596 80.518,96.596 ; 80.137,96.672 80.67,96.672 ; 80.137,96.749 80.747,96.749 ; 80.137,97.206 80.67,97.206 ; 80.137,104.216 80.518,104.216 ; 80.213,97.282 80.594,97.282 ; 80.213,104.292 80.67,104.292 ; 80.289,97.358 80.442,97.358 ; 80.289,104.369 80.747,104.369 ; 80.366,104.445 80.899,104.445 ; 80.442,96.139 80.67,96.139 ; 80.442,96.215 81.051,96.215 ; 80.442,97.13 80.747,97.13 ; 80.518,96.291 80.899,96.291 ; 80.518,96.825 80.747,96.825 ; 80.518,97.053 80.747,97.053 ; 80.518,100.33 80.823,100.33 ; 80.518,100.406 80.823,100.406 ; 80.518,100.482 80.823,100.482 ; 80.518,104.521 81.051,104.521 ; 80.594,96.368 80.899,96.368 ; 80.594,96.901 80.823,96.901 ; 80.594,96.977 80.823,96.977 ; 80.594,99.339 81.204,99.339 ; 80.594,99.416 84.404,99.416 ; 80.594,99.492 83.185,99.492 ; 80.594,99.568 83.109,99.568 ; 80.594,99.644 83.185,99.644 ; 80.594,99.72 83.185,99.72 ; 80.594,100.178 81.204,100.178 ; 80.594,100.254 81.204,100.254 ; 80.594,100.559 81.204,100.559 ; 80.594,100.635 81.204,100.635 ; 80.594,100.711 81.204,100.711 ; 80.594,100.787 81.204,100.787 ; 80.594,100.863 81.204,100.863 ; 80.594,100.94 81.204,100.94 ; 80.67,96.444 81.051,96.444 ; 80.67,99.035 81.28,99.035 ; 80.67,99.111 81.204,99.111 ; 80.67,99.187 81.204,99.187 ; 80.67,99.263 81.204,99.263 ; 80.67,99.797 84.328,99.797 ; 80.67,101.016 81.204,101.016 ; 80.67,101.092 81.204,101.092 ; 80.67,101.168 81.204,101.168 ; 80.67,101.244 81.204,101.244 ; 80.67,101.321 81.204,101.321 ; 80.67,101.397 81.28,101.397 ; 80.67,104.597 81.204,104.597 ; 80.747,98.882 81.509,98.882 ; 80.747,98.958 81.432,98.958 ; 80.747,100.101 81.051,100.101 ; 80.747,101.473 81.432,101.473 ; 80.747,101.549 81.585,101.549 ; 80.747,104.673 81.432,104.673 ; 80.823,96.139 81.28,96.139 ; 80.823,96.52 81.356,96.52 ; 80.823,98.73 81.813,98.73 ; 80.823,98.806 81.661,98.806 ; 80.823,101.625 81.737,101.625 ; 80.899,96.596 81.356,96.596 ; 80.899,98.654 81.89,98.654 ; 80.899,101.702 81.813,101.702 ; 80.899,104.75 81.585,104.75 ; 80.975,96.063 81.28,96.063 ; 80.975,100.33 81.28,100.33 ; 80.975,100.482 81.28,100.482 ; 80.975,101.778 81.966,101.778 ; 81.051,95.987 81.28,95.987 ; 81.051,96.672 81.356,96.672 ; 81.051,98.577 82.042,98.577 ; 81.051,100.406 81.28,100.406 ; 81.051,101.854 82.042,101.854 ; 81.128,95.758 81.28,95.758 ; 81.128,95.834 81.28,95.834 ; 81.128,95.91 81.28,95.91 ; 81.128,96.215 81.28,96.215 ; 81.128,96.291 81.28,96.291 ; 81.128,96.368 81.356,96.368 ; 81.128,96.444 81.356,96.444 ; 81.128,96.749 81.356,96.749 ; 81.128,98.501 82.194,98.501 ; 81.128,104.826 81.89,104.826 ; 81.204,101.93 82.194,101.93 ; 81.28,98.425 82.347,98.425 ; 81.28,102.006 82.347,102.006 ; 81.28,104.902 82.271,104.902 ; 81.432,98.349 82.499,98.349 ; 81.432,102.083 82.499,102.083 ; 81.432,104.978 82.652,104.978 ; 81.509,96.368 82.271,96.368 ; 81.509,96.444 82.042,96.444 ; 81.509,96.52 81.737,96.52 ; 81.509,98.273 82.575,98.273 ; 81.585,95.529 81.813,95.529 ; 81.585,95.606 81.813,95.606 ; 81.585,95.682 81.813,95.682 ; 81.585,95.758 81.89,95.758 ; 81.585,102.159 82.575,102.159 ; 81.661,95.834 81.89,95.834 ; 81.661,95.91 81.89,95.91 ; 81.661,95.987 81.89,95.987 ; 81.661,96.063 81.89,96.063 ; 81.661,98.196 82.728,98.196 ; 81.661,105.054 84.633,105.054 ; 81.737,96.139 81.89,96.139 ; 81.737,96.215 81.966,96.215 ; 81.737,96.291 82.271,96.291 ; 81.737,100.254 83.109,100.254 ; 81.737,100.33 81.966,100.33 ; 81.737,100.406 81.966,100.406 ; 81.737,100.482 82.042,100.482 ; 81.737,101.092 82.042,101.092 ; 81.737,101.168 81.966,101.168 ; 81.737,101.244 81.966,101.244 ; 81.737,101.321 83.109,101.321 ; 81.737,102.235 82.804,102.235 ; 81.813,98.12 82.88,98.12 ; 81.813,100.178 83.033,100.178 ; 81.813,100.559 83.261,100.559 ; 81.813,100.635 82.423,100.635 ; 81.813,100.94 85.547,100.94 ; 81.813,101.016 85.547,101.016 ; 81.813,101.397 83.033,101.397 ; 81.813,102.311 82.88,102.311 ; 81.89,100.101 82.271,100.101 ; 81.89,100.711 82.347,100.711 ; 81.89,100.863 82.347,100.863 ; 81.89,101.473 82.347,101.473 ; 81.89,105.131 84.404,105.131 ; 81.966,98.044 84.176,98.044 ; 81.966,102.387 84.176,102.387 ; 82.042,97.968 84.099,97.968 ; 82.118,96.215 82.194,96.215 ; 82.118,102.464 84.099,102.464 ; 82.194,97.892 83.947,97.892 ; 82.194,100.33 83.109,100.33 ; 82.194,100.406 83.185,100.406 ; 82.194,100.482 83.185,100.482 ; 82.194,101.092 83.185,101.092 ; 82.194,101.168 83.109,101.168 ; 82.194,101.244 83.109,101.244 ; 82.271,95.606 82.499,95.606 ; 82.271,95.682 82.499,95.682 ; 82.271,95.758 82.499,95.758 ; 82.271,95.834 82.499,95.834 ; 82.271,95.91 82.499,95.91 ; 82.271,102.54 83.947,102.54 ; 82.271,105.207 84.023,105.207 ; 82.347,95.453 83.033,95.453 ; 82.347,95.529 82.575,95.529 ; 82.347,95.987 82.499,95.987 ; 82.347,96.063 82.575,96.063 ; 82.347,96.139 82.575,96.139 ; 82.347,96.215 82.575,96.215 ; 82.347,96.291 82.575,96.291 ; 82.347,97.815 83.795,97.815 ; 82.423,95.377 82.956,95.377 ; 82.423,97.739 83.718,97.739 ; 82.423,102.616 83.795,102.616 ; 82.499,102.692 83.718,102.692 ; 82.575,97.663 83.566,97.663 ; 82.652,102.768 83.566,102.768 ; 82.728,97.587 83.414,97.587 ; 82.804,95.529 83.033,95.529 ; 82.804,102.845 83.337,102.845 ; 82.88,95.606 83.109,95.606 ; 82.88,95.682 83.109,95.682 ; 82.88,95.758 83.109,95.758 ; 82.88,95.834 83.109,95.834 ; 82.88,95.91 83.109,95.91 ; 82.88,95.987 83.109,95.987 ; 82.88,96.063 83.109,96.063 ; 82.88,100.635 85.547,100.635 ; 82.956,96.139 83.109,96.139 ; 82.956,96.215 83.109,96.215 ; 82.956,96.291 83.109,96.291 ; 82.956,99.873 84.404,99.873 ; 83.033,99.111 84.404,99.111 ; 83.033,99.187 83.947,99.187 ; 83.033,99.263 83.947,99.263 ; 83.033,99.339 84.404,99.339 ; 83.033,99.949 83.947,99.949 ; 83.033,100.025 83.947,100.025 ; 83.033,100.711 85.547,100.711 ; 83.033,100.787 85.547,100.787 ; 83.033,100.863 85.547,100.863 ; 83.109,99.035 84.404,99.035 ; 83.109,100.101 83.947,100.101 ; 83.109,100.178 84.404,100.178 ; 83.185,95.987 83.49,95.987 ; 83.185,96.063 83.414,96.063 ; 83.185,96.139 83.414,96.139 ; 83.185,100.254 84.328,100.254 ; 83.261,95.453 83.795,95.453 ; 83.261,95.529 83.871,95.529 ; 83.261,95.606 83.414,95.606 ; 83.261,95.91 83.718,95.91 ; 83.261,96.215 83.795,96.215 ; 83.261,96.291 83.795,96.291 ; 83.261,104.978 84.861,104.978 ; 83.337,95.377 83.718,95.377 ; 83.337,95.834 83.795,95.834 ; 83.337,98.12 84.328,98.12 ; 83.337,102.311 84.328,102.311 ; 83.414,102.235 84.48,102.235 ; 83.49,95.758 83.871,95.758 ; 83.49,98.196 84.48,98.196 ; 83.566,98.273 84.633,98.273 ; 83.566,102.159 84.633,102.159 ; 83.642,96.139 83.795,96.139 ; 83.718,95.606 83.871,95.606 ; 83.718,95.682 83.871,95.682 ; 83.718,98.349 84.785,98.349 ; 83.718,102.083 84.785,102.083 ; 83.795,99.492 84.328,99.492 ; 83.795,102.006 84.861,102.006 ; 83.871,98.425 84.861,98.425 ; 83.871,98.958 84.328,98.958 ; 83.871,99.568 84.252,99.568 ; 83.871,99.72 84.252,99.72 ; 83.871,104.902 85.09,104.902 ; 83.947,98.501 85.014,98.501 ; 83.947,100.33 84.252,100.33 ; 83.947,101.93 85.014,101.93 ; 84.023,98.882 84.176,98.882 ; 84.099,98.577 85.166,98.577 ; 84.099,101.854 85.09,101.854 ; 84.176,99.187 84.404,99.187 ; 84.176,99.263 84.404,99.263 ; 84.176,99.949 84.404,99.949 ; 84.176,100.025 84.404,100.025 ; 84.176,100.101 84.404,100.101 ; 84.252,98.654 85.242,98.654 ; 84.252,101.778 85.242,101.778 ; 84.252,104.826 85.166,104.826 ; 84.328,101.702 85.319,101.702 ; 84.404,98.73 85.319,98.73 ; 84.48,98.806 85.395,98.806 ; 84.48,101.625 85.395,101.625 ; 84.557,104.75 85.395,104.75 ; 84.633,98.882 85.471,98.882 ; 84.633,101.549 85.395,101.549 ; 84.709,98.958 85.471,98.958 ; 84.709,101.473 85.471,101.473 ; 84.709,104.673 85.547,104.673 ; 84.861,99.035 85.471,99.035 ; 84.861,100.025 85.166,100.025 ; 84.861,101.397 85.471,101.397 ; 84.861,104.597 85.623,104.597 ; 84.938,99.111 85.547,99.111 ; 84.938,99.797 85.547,99.797 ; 84.938,99.873 85.623,99.873 ; 84.938,99.949 85.166,99.949 ; 84.938,100.101 85.166,100.101 ; 84.938,100.178 85.623,100.178 ; 84.938,100.254 85.547,100.254 ; 84.938,101.244 85.547,101.244 ; 84.938,101.321 85.547,101.321 ; 85.014,99.187 85.547,99.187 ; 85.014,99.263 85.547,99.263 ; 85.014,99.339 85.547,99.339 ; 85.014,99.416 85.547,99.416 ; 85.014,99.492 85.547,99.492 ; 85.014,99.568 85.547,99.568 ; 85.014,99.644 85.547,99.644 ; 85.014,99.72 85.547,99.72 ; 85.014,101.092 85.547,101.092 ; 85.014,101.168 85.547,101.168 ; 85.014,104.521 85.776,104.521 ; 85.09,100.33 85.471,100.33 ; 85.166,104.445 85.852,104.445 ; 85.319,100.101 85.623,100.101 ; 85.319,104.369 86.004,104.369 ; 85.395,95.987 85.547,95.987 ; 85.395,96.063 85.623,96.063 ; 85.395,99.949 85.623,99.949 ; 85.395,100.025 85.623,100.025 ; 85.471,96.139 85.776,96.139 ; 85.471,104.292 86.081,104.292 ; 85.547,104.216 86.157,104.216 ; 85.623,96.215 85.852,96.215 ; 85.7,96.291 86.004,96.291 ; 85.7,104.14 86.309,104.14 ; 85.776,96.368 86.081,96.368 ; 85.776,104.064 86.385,104.064 ; 85.928,96.444 86.157,96.444 ; 85.928,103.988 86.462,103.988 ; 86.004,96.52 86.233,96.52 ; 86.004,103.911 86.538,103.911 ; 86.081,96.596 86.309,96.596 ; 86.081,103.835 86.614,103.835 ; 86.157,103.759 86.69,103.759 ; 86.233,96.672 86.462,96.672 ; 86.233,103.683 86.766,103.683 ; 86.309,96.749 86.462,96.749 ; 86.309,96.901 86.385,96.901 ; 86.309,96.977 86.385,96.977 ; 86.309,103.607 86.843,103.607 ; 86.385,96.825 86.614,96.825 ; 86.385,97.053 86.766,97.053 ; 86.385,103.53 86.919,103.53 ; 86.462,96.901 86.69,96.901 ; 86.462,96.977 86.69,96.977 ; 86.462,97.13 86.843,97.13 ; 86.462,97.206 87.071,97.206 ; 86.462,103.454 86.995,103.454 ; 86.538,97.282 87.147,97.282 ; 86.538,103.378 87.071,103.378 ; 86.614,97.358 87.224,97.358 ; 86.614,103.302 87.071,103.302 ; 86.69,97.434 87.224,97.434 ; 86.69,103.149 87.224,103.149 ; 86.69,103.226 87.147,103.226 ; 86.766,97.511 87.3,97.511 ; 86.766,97.587 87.376,97.587 ; 86.766,103.073 87.224,103.073 ; 86.843,97.663 87.376,97.663 ; 86.843,102.921 87.376,102.921 ; 86.843,102.997 87.3,102.997 ; 86.919,97.13 87.071,97.13 ; 86.919,97.739 87.452,97.739 ; 86.919,97.815 87.528,97.815 ; 86.919,102.845 87.376,102.845 ; 86.995,97.892 87.528,97.892 ; 86.995,97.968 87.528,97.968 ; 86.995,102.692 87.452,102.692 ; 86.995,102.768 87.452,102.768 ; 87.071,98.044 87.605,98.044 ; 87.071,102.54 87.528,102.54 ; 87.071,102.616 87.528,102.616 ; 87.147,98.12 87.605,98.12 ; 87.147,98.196 87.681,98.196 ; 87.147,102.387 87.605,102.387 ; 87.147,102.464 87.605,102.464 ; 87.224,98.273 87.681,98.273 ; 87.224,98.349 87.757,98.349 ; 87.224,102.235 87.681,102.235 ; 87.224,102.311 87.681,102.311 ; 87.3,98.425 87.757,98.425 ; 87.3,98.501 87.833,98.501 ; 87.3,102.083 87.757,102.083 ; 87.3,102.159 87.757,102.159 ; 87.376,98.577 87.833,98.577 ; 87.376,98.654 87.833,98.654 ; 87.376,98.73 87.833,98.73 ; 87.376,98.806 87.909,98.806 ; 87.376,98.882 87.909,98.882 ; 87.376,101.778 87.833,101.778 ; 87.376,101.854 87.833,101.854 ; 87.376,101.93 87.833,101.93 ; 87.376,102.006 87.757,102.006 ; 87.452,98.958 87.986,98.958 ; 87.452,99.035 87.986,99.035 ; 87.452,99.111 87.986,99.111 ; 87.452,101.549 87.986,101.549 ; 87.452,101.625 87.909,101.625 ; 87.452,101.702 87.909,101.702 ; 87.528,99.187 87.986,99.187 ; 87.528,99.263 87.986,99.263 ; 87.528,99.339 88.062,99.339 ; 87.528,99.416 88.062,99.416 ; 87.528,101.244 87.986,101.244 ; 87.528,101.321 87.986,101.321 ; 87.528,101.397 87.986,101.397 ; 87.528,101.473 87.986,101.473 ; 87.605,99.492 88.062,99.492 ; 87.605,99.568 88.062,99.568 ; 87.605,99.644 88.062,99.644 ; 87.605,99.72 88.062,99.72 ; 87.605,99.797 88.062,99.797 ; 87.605,99.873 88.062,99.873 ; 87.605,99.949 88.062,99.949 ; 87.605,100.025 88.062,100.025 ; 87.605,100.101 88.062,100.101 ; 87.605,100.178 88.062,100.178 ; 87.605,100.711 88.062,100.711 ; 87.605,100.787 88.062,100.787 ; 87.605,100.863 88.062,100.863 ; 87.605,100.94 88.062,100.94 ; 87.605,101.016 88.062,101.016 ; 87.605,101.092 88.062,101.092 ; 87.605,101.168 88.062,101.168 ; 87.681,100.254 88.062,100.254 ; 87.681,100.33 88.062,100.33 ; 87.681,100.406 88.062,100.406 ; 87.681,100.482 88.062,100.482 ; 87.681,100.559 88.062,100.559 ; 87.681,100.635 88.062,100.635
  Top Layer w0.254: 73.914,99.314 74.052,99.452 74.052,100.203 71.512,100.203 71.512,100.965 76.592,100.965 76.592,101.727 71.512,101.727 71.512,102.489 76.592,102.489 76.592,103.251 71.512,103.251 71.512,104.013 76.592,104.013 76.592,104.775 71.512,104.775 71.512,105.537 76.592,105.537 76.592,106.299 71.512,106.299 71.512,107.061 76.592,107.061 76.592,107.823 75.824,107.823 75.824,108.077